# Altium PCB STM32F407VGT6.pcbdoc
Units mil, origin at the board's own origin, x right, y up, seen from the top; angles counter-clockwise.
Board outline 3885 x 2690 mil, 2 copper layers (Top Layer, Bottom Layer); 67 components, 120 nets, 346 pads, 112 vias.
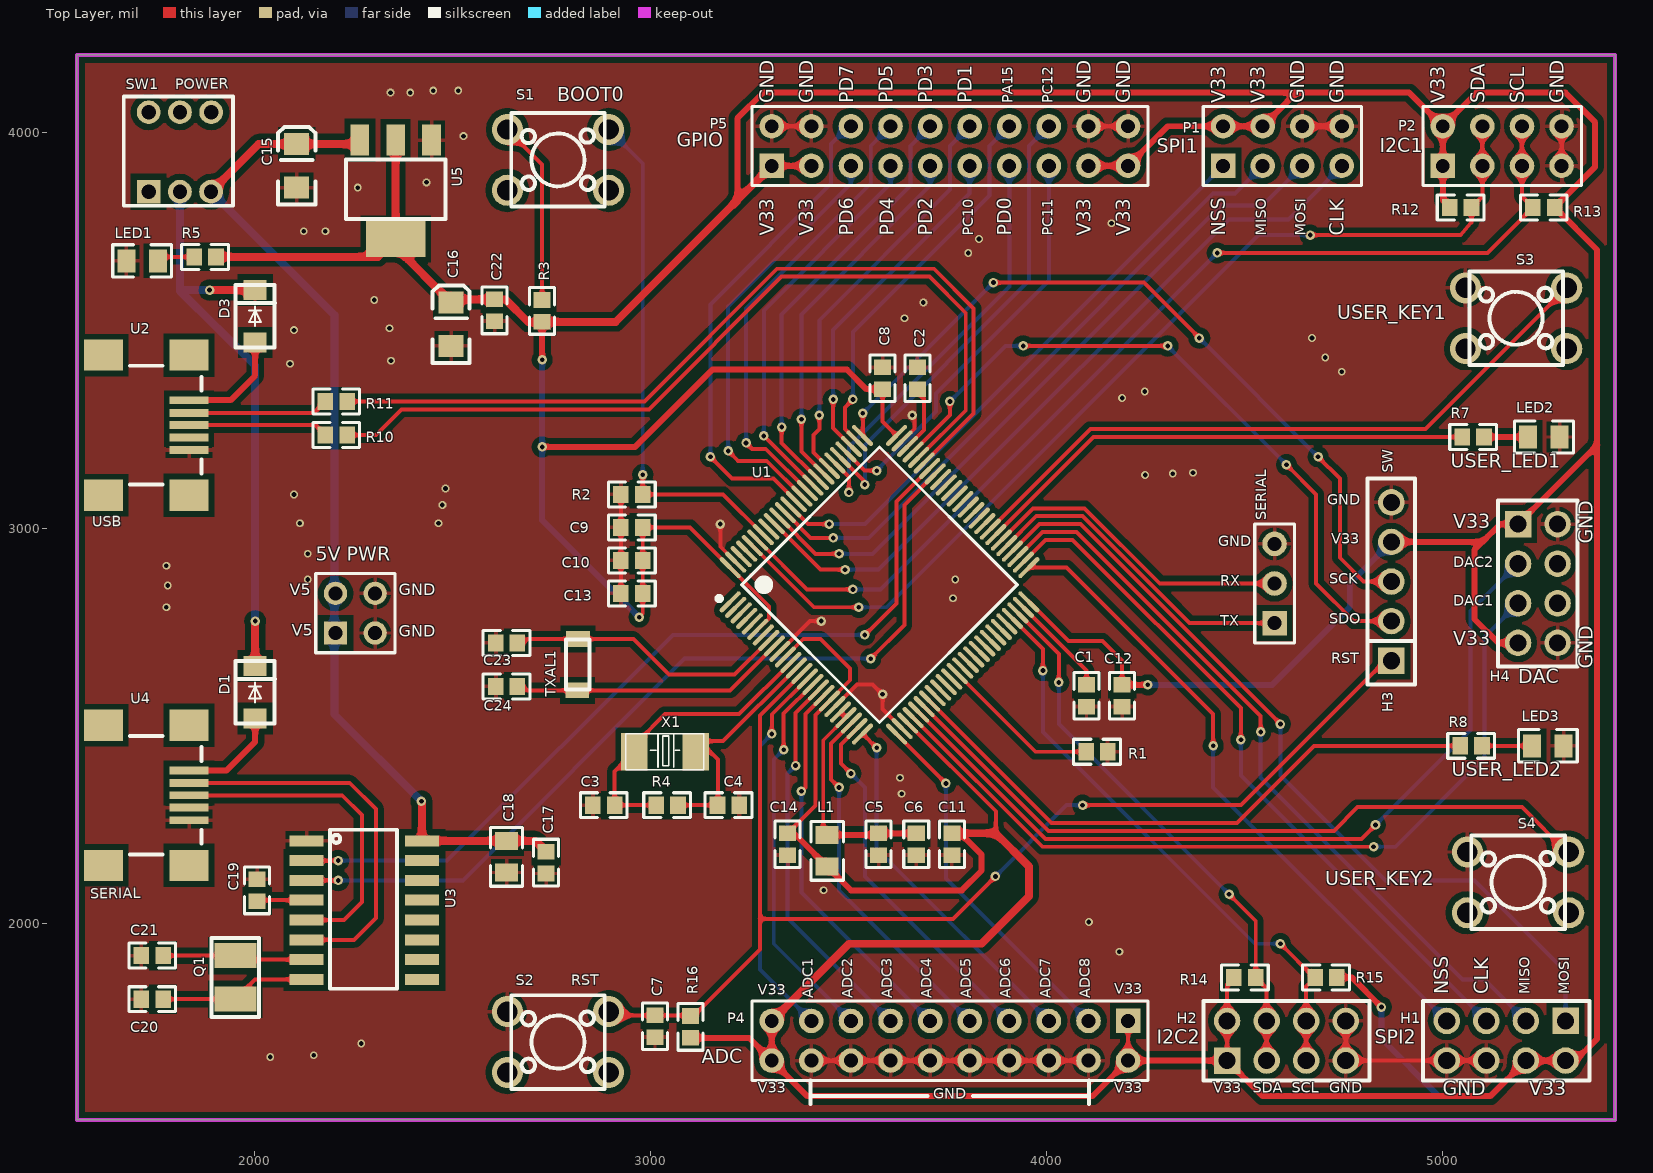
[diagram p0: Top Layer view]
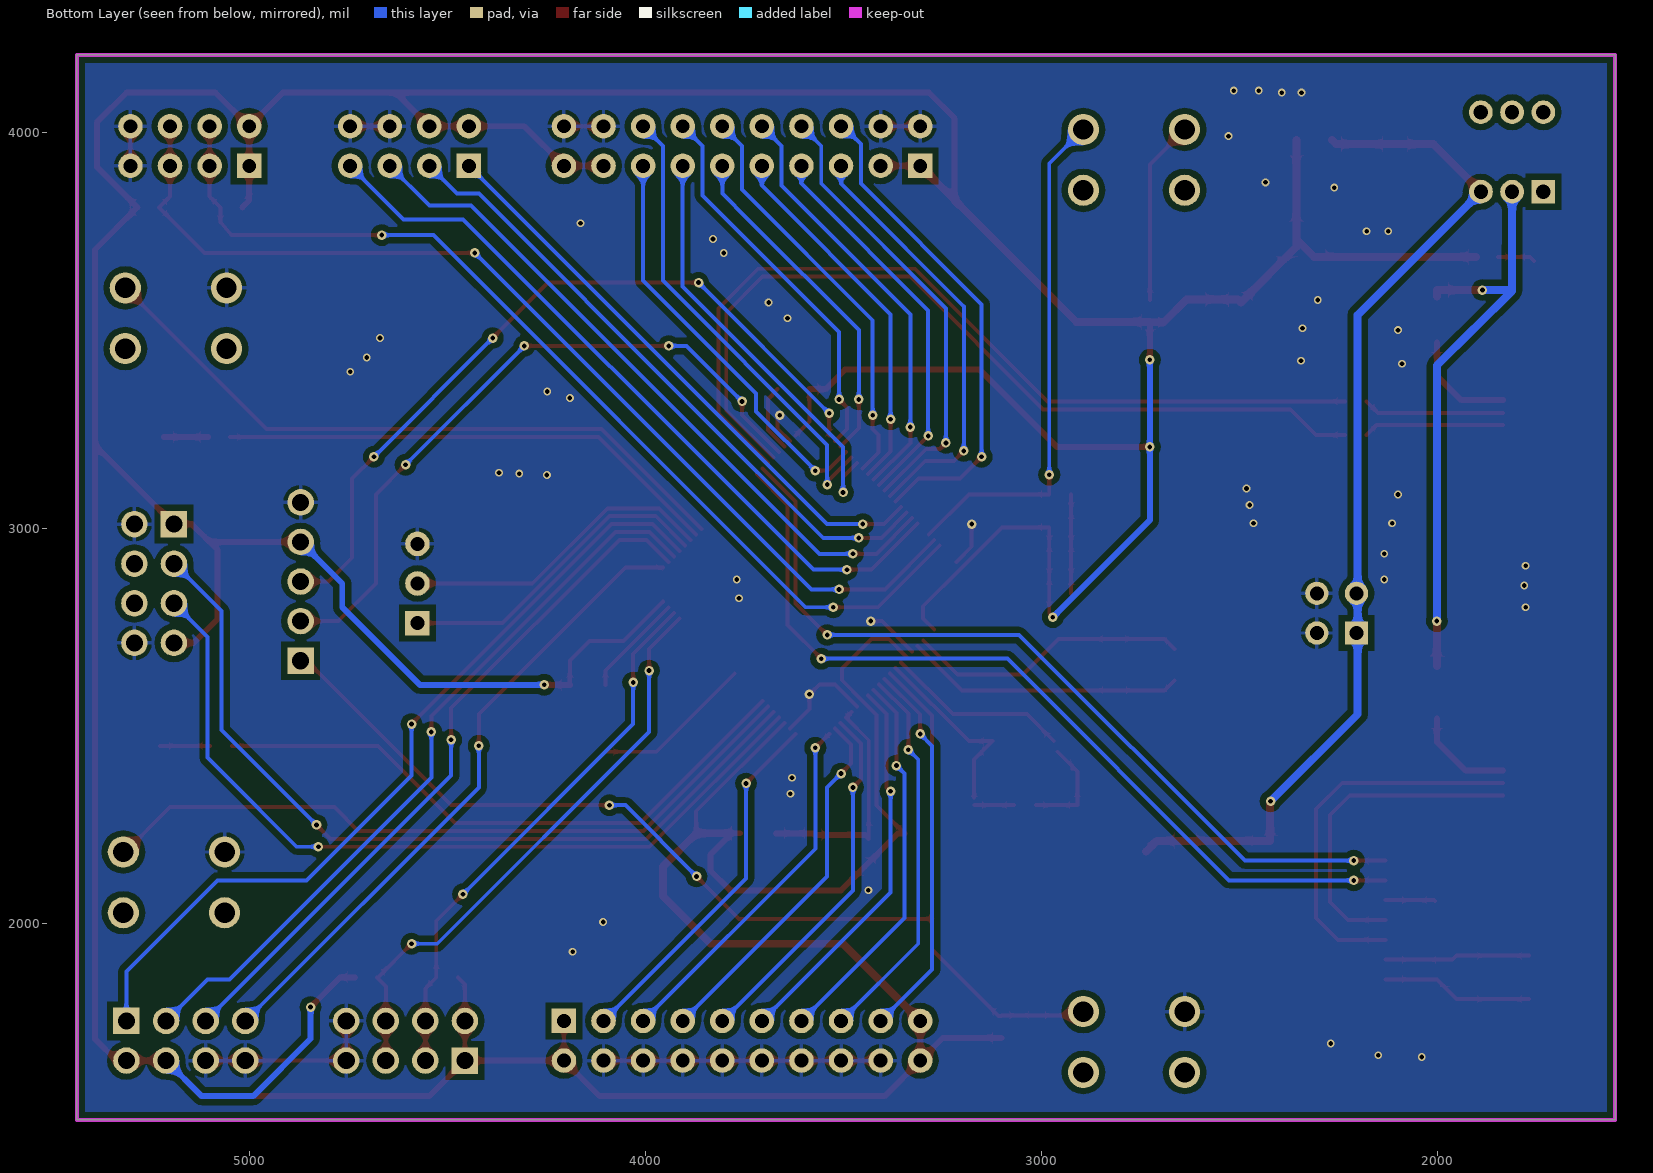
[diagram p1: Bottom Layer view, seen from below]

## Layer stack, top to bottom
Top Solder: solder mask 0.4, Solder Resist, Dk 3.5
Top Layer: signal copper 1.4
Dielectric1: dielectric 12.6, FR-4, Dk 4.8
Bottom Layer: signal copper 1.4
Bottom Solder: solder mask 0.4, Solder Resist, Dk 3.5

## Board outline
1552,1505 1552,4195 5437,4195 5437,1505

## Design rules (kind name [scope] priority, off if disabled: settings)
Clearance [All] p1: gap=5 ignorepadtopadclearanceinfootprint=FALSE except(15: Arc-Fill Arc-Poly Arc-Region Track-Fill Track-Poly Track-Region SMDPad-Fill SMDPad-Poly SMDPad-Region THPad-Fill THPad-Poly THPad-Region Via-Fill Via-Poly Via-Region Fill-Fill Fill-Poly Fill-Region Poly-Poly Poly-Region Region-Region)
PolygonConnect PolygonConnect_1 [All vs IsVia] p1: connectstyle=Direct reliefconductorwidth=10 reliefentries=4 polygonreliefangle="90 Angle" airgapwidth=10
PolygonConnect [All] p2: connectstyle=Relief reliefconductorwidth=10 reliefentries=4 polygonreliefangle="90 Angle" airgapwidth=10
RoutingVias [All] p1: holewidth=28 width=50 viastyle="Through Hole" minholewidth=28 minwidth=50 maxholewidth=28 maxwidth=50
SolderMaskExpansion [All] p1: expansion=4
Width [All] p1: maxlimit=30 minlimit=10 preferedwidth=10 minimp=50.000000 maximp=50.000000 favimp=50.000000
30 further rules are at their usual default settings.

## Components (designator, comment, footprint, x,y, rotation, side; value= is the part's Value field where it differs from the comment)
"5V PWR" "Comment" HDR2X2 2205,2735 r0 top
C1 "2.2uF" 0603#1 4102,2545 r90 top
C2 "2.2uF" 0603#1 3675,3410 r270 top
C3 "20pF" 0603#1 2914.05,2300 r180 top
C4 "20pF" 0603#1 3166.06,2300 r0 top
C5 "1uF" 0603#1 3577,2170 r90 top
C6 "104" 0603#1 3672,2170 r90 top
C7 "104" 0603#1 3012,1710 r90 top
C8 "10uF" 0603#1 3587,3410 r270 top
C9 "104" 0603#1 2922,3001.67 r0 top
C10 "104" 0603#1 2922,2918.33 r0 top
C11 "104" 0603#1 3762,2170 r90 top
C12 "104" 0603#1 4192,2545 r90 top
C13 "104" 0603#1 2922,2835 r0 top
C14 "104" 0603#1 3347,2170 r90 top
C15 "10UF-TANT" EIA3216 2107,3915 r90 top
C16 "10UF-TANT" EIA3216 2497,3515 r90 top
C17 "104" 0603#2 2737,2155 r90 top
C18 "10u" 0805#1 2637,2170 r90 top
C19 "104" 0603#2 2007,2085 r90 top
C20 "22p" 0603#2 1742,1810 r0 top
C21 "22p" 0603#2 1742,1920 r0 top
C22 "1u" 0603#2 2607,3550 r270 top
C23 "10p" 0603#2 2637,2710 r0 top
C24 "10p" 0603#2 2637,2600 r0 top
D1 "1N5824" SMA/DO-214AC 2002,2585 r90 top
D3 "1N5824" SMA/DO-214AC 2002,3535 r90 top
H1 "SPI2" DIP-2X4P-2.54 5162,1705 r180 top
H2 "I2C2" DIP-2X4P-2.54 4607,1705 r0 top
H3 "SW" DIP-1X5P-2.54MM-M 4872,2865 r90 top
H4 "Header-Female-2.54_2x4" DIP-2X4P-2.54 5242,2860 r270 top
L1 "100Ω" 0805#2 3447,2145 r90 top
LED1 "0805R (Blue)" 0805#2 1677,3675 r0 top
LED2 "0805R (Red)" 0805#2 5297,3230 r180 top
LED3 "0805R (Red)" 0805#2 5307,2450 r180 top
P1 "SPI1" HDR-4X2/2.54 4597,3965 r0 top
P2 "I2C1" HDR-4X2/2.54 5152,3965 r0 top
P4 "ADC" HDR-10X2/2.54 3757,1705 r180 top
P5 "GPIO" HDR-10X2/2.54 3757,3965 r0 top
Q1 "XTALfast" 3225 1952,1865 r90 top
R1 "10KΩ" 0603#1 4097,2435 r0 top
R2 "10KΩ" 0603#1 2922,3085 r0 top
R3 "1KΩ" 0603#1 2727,3580 r270 top
R4 "1MΩ" 0603#1 3074.05,2300 r180 top
R5 "1KΩ" 0603#1 1907,3685 r180 top
R7 "1KΩ" 0603#1 5047,3230 r0 top
R8 "1KΩ" 0603#1 5042,2450 r0 top
R10 "22" 0603#2 2207,3235 r180 top
R11 "22" 0603#2 2207,3320 r180 top
R12 "1k" 0603#2 5047,3810 r180 top
R13 "1k" 0603#2 5257,3810 r0 top
R14 "1k" 0603#2 4502,1865 r180 top
R15 "1k" 0603#2 4707,1865 r0 top
R16 "10k" 0603#2 3102,1740 r270 top
S1 "按键" KEY-TOUCH-DIP-6.0*6.0*H-(YX)_1 2767,3930 r0 top
S2 "按键" KEY-TOUCH-DIP-6.0*6.0*H-(YX)_1 2767,1701.77 r0 top
S3 "按键" KEY-TOUCH-DIP-6.0*6.0*H-(YX)_1 5187,3530 r0 top
S4 "按键" KEY-TOUCH-DIP-6.0*6.0*H-(YX)_1 5192,2105 r0 top
SERIAL "USART" HDR-3X1/2.54 4577,2860 r90 top (schematic designator P3)
SW1 "K8-7071D-L1" KEY-7X7 1812,3950 r0 top
TXAL1 "32.768K" SMD-3215_2P 2817,2655 r90 top
U1 "STM32F407VGT6" LQFP-100_14X14X05P 3202,2900 r45 top
U2 "MINI USB" USB-MINI-B 1727,3260 r0 top
U3 "CH340G" CH340G 2132,2210 r270 top
U4 "MINI USB" USB-MINI-B 1727,2325 r0 top
U5 "AMS1117-3.3" SOT-223 2357,3855 r270 top
X1 "8MHZ" SMD-5032_2P 2917.25,2518.03 r0 top

## Footprints (in the part's own frame and the unit in brackets; to place one, negate y for a bottom-side part, rotate by r counter-clockwise, add the part's x,y. Pads: shape width x height; smd on the part's side, far side on the other; paste and mask are expansions set on the pad)
0603#1 [mm]
  rect 1x1.1 smd: 1(0.1,0) 2(1.5,0)
  silkscreen extent -0.7,-0.8 2.3,0.8
0603#2 [mm]
  rect 1x1.1 smd: 1(-0.7,0) 2(0.7,0)
  silkscreen extent -1.5,-0.8 1.5,0.8
0805#1 [mm]
  rect 1.16x1.45 smd: 1(-1.016,0) 2(1.016,0)
  silkscreen extent -1.9,-1.03 1.87,1.04
0805#2 [mm]
  rect 1.16x1.47 smd: 1(0,0) 2(2.032,0)
  silkscreen extent -0.88,-1.04 2.89,1.04
3225 [mil]
  rect 63x106.3 smd: 1(-55,0) 2(55,0)
  silkscreen extent -100,-60 100,60
CH340G [mil]
  rect 27.6x86.6 smd: 1(0,0) 2(50,0) 3(100,0) 4(150,0) 5(200,0) 6(250,0) 7(300,0) 8(350,0) 9(350,291.3) 10(300,291.3) 11(250,291.3) 12(200,291.3) 13(150,291.3) 14(100,291.3) 15(50,291.3) 16(0,291.3)
  silkscreen extent -28,59 374,228
DIP-1X5P-2.54MM-M [mm]
  rect 1.7x1.7 hole 1.1: 1(-5.08,0)
  round 1.7 hole 1.1: 2(-2.54,0) 3(0,0) 4(2.54,0) 5(5.08,0)
  silkscreen extent -6.6,-1.52 6.6,1.52
DIP-2X4P-2.54 [mm]
  rect 1.7x1.7 hole 1.1: 1(-3.81,-1.27)
  round 1.7 hole 1.1: 2(-3.81,1.27) 3(-1.27,-1.27) 4(-1.27,1.27) 5(1.27,-1.27) 6(1.27,1.27) 7(3.81,-1.27) 8(3.81,1.27)
  silkscreen extent -5.33,-2.54 5.33,2.54
EIA3216 [mil]
  rect 55.1x63 smd: A(55,0) C(-55,0)
  silkscreen extent -98,-47 98,47
HDR2X2 [mm] "Connector; Header; 2x2 Position"
  rect 1.5x1.5 hole 0.9: 1(0,0)
  round 1.5 hole 0.9: 2(0,2.54) 3(2.54,0) 4(2.54,2.54)
  silkscreen extent -1.27,-1.27 3.81,3.81
HDR-3X1/2.54 [mil]
  rect 62x62 hole 35: 1(-100,0)
  round 62 hole 35: 2(0,0) 3(100,0)
  silkscreen extent -150,-50 150,50
HDR-4X2/2.54 [mil]
  rect 62x62 hole 35: 1(-150,-50)
  round 62 hole 35: 2(-150,50) 3(-50,-50) 4(-50,50) 5(50,-50) 6(50,50) 7(150,-50) 8(150,50)
  silkscreen extent -200,-100 200,100
HDR-10X2/2.54 [mil]
  rect 62x62 hole 35: 1(-450,-50)
  round 62 hole 35: 2(-450,50) 3(-350,-50) 4(-350,50) 5(-250,-50) 6(-250,50) 7(-150,-50) 8(-150,50) 9(-50,-50) 10(-50,50) 11(50,-50) 12(50,50) 13(150,-50) 14(150,50) 15(250,-50) 16(250,50) 17(350,-50) 18(350,50) 19(450,-50) 20(450,50)
  silkscreen extent -500,-100 500,100
KEY-7X7 [mil]
  rect 60x60 hole 36: 1(-78.9,-100.4)
  round 60 hole 36: 2(-0.1,-100.4) 3(78.6,-100.4) 4(-79,100.4) 5(0.1,100.4) 6(79,100.4)
  silkscreen extent -142,-136 134,140
KEY-TOUCH-DIP-6.0*6.0*H-(YX)_1 [mm]
  round 2 hole 1.3: 1(-3.25,1.95) 2(3.25,1.95) 3(-3.25,-1.95) 4(3.25,-1.95)
  silkscreen extent -3,-3 3,3
LQFP-100_14X14X05P [mm]
  oval 1.8x0.28 smd: 1(-1.55,-1.55) 2(-1.55,-2.05) 3(-1.55,-2.55) 4(-1.55,-3.05) 5(-1.55,-3.55) 6(-1.55,-4.05) 7(-1.55,-4.55) 8(-1.55,-5.05) 9(-1.55,-5.55) 10(-1.55,-6.05) 11(-1.55,-6.55) 12(-1.55,-7.05) 13(-1.55,-7.55) 14(-1.55,-8.05) 15(-1.55,-8.55) 16(-1.55,-9.05) 17(-1.55,-9.55) 18(-1.55,-10.05) 19(-1.55,-10.55) 20(-1.55,-11.05) 21(-1.55,-11.55) 22(-1.55,-12.05) 23(-1.55,-12.55) 24(-1.55,-13.05) 25(-1.55,-13.55) 51(13.55,-13.55) 52(13.55,-13.05) 53(13.55,-12.55) 54(13.55,-12.05) 55(13.55,-11.55) 56(13.55,-11.05) 57(13.55,-10.55) 58(13.55,-10.05) 59(13.55,-9.55) 60(13.55,-9.05) 61(13.55,-8.55) 62(13.55,-8.05) 63(13.55,-7.55) 64(13.55,-7.05) 65(13.55,-6.55) 66(13.55,-6.05) 67(13.55,-5.55) 68(13.55,-5.05) 69(13.55,-4.55) 70(13.55,-4.05) 71(13.55,-3.55) 72(13.55,-3.05) 73(13.55,-2.55) 74(13.55,-2.05) 75(13.55,-1.55)
  oval 0.28x1.8 smd: 26(0,-15.1) 27(0.5,-15.1) 28(1,-15.1) 29(1.5,-15.1) 30(2,-15.1) 31(2.5,-15.1) 32(3,-15.1) 33(3.5,-15.1) 34(4,-15.1) 35(4.5,-15.1) 36(5,-15.1) 37(5.5,-15.1) 38(6,-15.1) 39(6.5,-15.1) 40(7,-15.1) 41(7.5,-15.1) 42(8,-15.1) 43(8.5,-15.1) 44(9,-15.1) 45(9.5,-15.1) 46(10,-15.1) 47(10.5,-15.1) 48(11,-15.1) 49(11.5,-15.1) 50(12,-15.1) 76(12,0) 77(11.5,0) 78(11,0) 79(10.5,0) 80(10,0) 81(9.5,0) 82(9,0) 83(8.5,0) 84(8,0) 85(7.5,0) 86(7,0) 87(6.5,0) 88(6,0) 89(5.5,0) 90(5,0) 91(4.5,0) 92(4,0) 93(3.5,0) 94(3,0) 95(2.5,0) 96(2,0) 97(1.5,0) 98(1,0) 99(0.5,0) 100(0,0)
  silkscreen extent -2.05,-13.8 12.25,-0.75
SMA/DO-214AC [mil]
  rect 50x57.9 smd: 1(-66.3,0) 2(66.3,0)
  silkscreen extent -79,-50 79,50
SMD-3215_2P [mil]
  rect 39.37x60 smd: 1(-64.91,1.06) 2(64.84,-0.85)
  silkscreen extent -63,-30 63,30
SMD-5032_2P [mm]
  rect 1.7x2.4 smd: 1(1.086,-2.109) 2(5.007,-2.11)
  silkscreen extent 0.53,-3.25 5.53,-0.95
SOT-223 [mm]
  rect 2x1.2 smd: 1(-3.175,2.3) 2(-3.175,0) 3(-3.175,-2.3)
  rect 2.3x3.8 smd: 4(3.175,0)
  silkscreen extent -1.93,-3.2 1.87,3.2
USB-MINI-B [mil]
  rect 98.4x19.7 smd: 1(108,63) 2(108,31.02) 3(108,0) 4(108,-31.03) 5(108,-63)
  rect 98.4x78.7 smd: MTN1(-108,177) MTN2(108,177) MTN3(-108,-177) MTN4(108,-177)
  silkscreen extent -41,-150 140,150

## Via types
v1: diameter 24, hole 12, Top Layer to Bottom Layer, 65 vias
v2: diameter 19.68, hole 11.81, Top Layer to Bottom Layer, 47 vias

## Nets (pads, with @x,y where several pads share a name; then routed paths per layer and width w, separated by ;. In a path a pad name is that pad's centre, name@x,y a point inside that pad or via, vN(x,y) a via of type N, cw(c..) or ccw(c..) an arc to the next point about the centre after c; other vN are vias at no path point)
ADC1: P4.17 U1.15 | length 967.3
  Top Layer w10: v1(3307,2480) 3307,2529 U1.15
  Bottom Layer w10: v1(3307,2480) 3277,2450 3277,2375 3277,1885 P4.17
ADC2: P4.15 U1.16 | length 971.6
  Top Layer w10: v1(3337,2440) 3337,2531.1 U1.16
  Bottom Layer w10: v1(3337,2440) 3312,2415 3312,2330 3312,1950 P4.15
ADC3: P4.13 U1.17 | length 975.9
  Top Layer w10: v1(3367,2400) 3367,2533.28 U1.17
  Bottom Layer w10: v1(3367,2400) 3347,2380 3347,2325 3347,2015 P4.13
ADC4: P4.11 U1.18 | length 980.1
  Top Layer w10: v1(3382,2335) 3392,2345 3392,2530.4 U1.18
  Bottom Layer w10: v1(3382,2335) 3382,2080 P4.11
ADC5: P4.9 U1.23 | length 918.7
  Top Layer w10: v1(3477,2345) 3457,2365 3457,2456.2 U1.23
  Bottom Layer w10: v1(3477,2345) 3477,2085 P4.9
ADC6: P4.7 U1.24 | length 931.2
  Top Layer w10: v1(3507,2380) 3482,2405 3482,2453.4 U1.24@3522.2,2493.5
  Bottom Layer w10: v1(3507,2380) 3542,2345 3542,2175 3542,2120 P4.7
ADC7: P4.5 U1.25 | length 920.5
  Top Layer w10: U1.25 3537.36,2479.64 v1(3572,2445)
  Bottom Layer w10: v1(3572,2445) 3572,2190 P4.5
ADC8: P4.3 U1.26 | length 925.3
  Top Layer w10: U1.26 v1(3747,2355)
  Bottom Layer w10: v1(3747,2355) 3747,2115 P4.3
D+: U3.5 U4.3 | length 836.4
  Top Layer w10: U4.3 2222,2325 2272,2275 2272,2055 2227,2010 U3.5
D-: U3.6 U4.2 | length 972.1
  Top Layer w10: U4.2 2240.98,2356.02 2307,2290 2307,2025 2307,2015 2257,1965 2252,1960 U3.6
DAC1: H4.5 U1.29 | length 2096.5
  Top Layer w10: U1.29 3990.51,2195 v1(4827,2195)
  Bottom Layer w10: v1(4827,2195) 4882,2195 5067,2380 5107,2420 5107,2690 5107,2725 H4.5
DAC2: H4.3 U1.30 | length 2110.3
  Top Layer w10: U1.30 3998.3,2215 4797,2215 v1(4832,2250)
  Bottom Layer w10: v1(4832,2250) 5072,2490 5072,2775 5072,2790 H4.3
GND: "5V PWR.3" "5V PWR.4" C1.1 C2.1 C3.2 C4.2 C5.1 C6.1 C7.1 C8.1 C9.1 C10.1 C11.1 C12.1 C13.1 C14.1 C15.C C16.C C17.1 C18.1 C19.2 C20.1 C21.1 C22.2 C23.1 C24.1 H1.6 H1.8 H2.7 H2.8 H3.5 H4.2 H4.8 LED1.1 LED2.1 LED3.1 P1.6 P1.8 P2.7 P2.8 P4.4 P4.6 P4.8 P4.10 P4.12 P4.14 P4.16 P4.18 P5.2 P5.4 P5.18 P5.20 R1.2 R2.1 S2.1 S3.1 S4.1 SERIAL.3 U1.10 U1.20 U1.27 U1.74 U1.99 U2.5 U3.1 U4.4 U4.5 U5.1 | length 2394.1
  Top Layer w10: C13.1 C10.1 C9.1 R2.1 ; v1(3177,3010) 3177,2952.83 U1.99 ; P5.2 P5.4 ; U1.10 3403.85,2765 v1(3432,2765) ; P4.18 P4.4 ; U1.20 3522.25,2605 3557,2605 3562,2605 v1(3587,2580) 3587,2542.83 U1.27 ; U1.74@3636.3,3220.1 3667,3250.9 3667,3280 v1(3662,3285) ; P5.18 P5.20 ; H2.8 H2.7 H1.6 ; P2.7 P2.8
  Top Layer w15: P1.6 P1.8
  other v2: 2040,1663.76 2150,1668.23 2270,1698.21 4185,1930 4108.01,2005 3438,2085 3635,2328.69 3630.93,2369.58 1777.8,2799.79 3764.82,2822.52 1781.33,2855 2135,2870 3770.38,2870 1777.8,2905 2135,2935 2115,3012.08 2465,3012.08 2475,3058.35 2100,3085 2482.78,3100 4250,3133.85 4320,3137.53 4370.99,3140 4192,3328.68 4249.26,3345 4747,3395 2090,3415 2345,3422.45 4705,3430.85 4671.8,3480 2100,3500 2341.49,3505 3642.09,3530 3690,3570 2302.78,3576.06 3803.32,3695 3830.26,3730 2125,3750 2179.45,3750 4165,3770 2261.16,3860 2435,3873.23 2528.11,3990 2343.76,4100 2393.84,4100 2452.01,4105 2515,4105
H4_4: H4.4
H4_6: H4.6
I2C1_SCL: P2.5 P2.6 R13.1 U1.95 | length 2625.5
  Top Layer w10: U1.95 3396.19,2845 v1(3512,2845) ; v1(4432,3695) 5114.4,3695 R13.1 ; P2.6 P2.5 5202,3837.44 R13.1
  Bottom Layer w10: v1(3512,2845) 3582,2845 v1(4432,3695)
I2C1_SDA: P2.3 P2.4 R12.1 U1.96 | length 2539.7
  Top Layer w10: U1.96 3413.35,2800 v1(3527,2800) ; v1(4667,3740) 5047,3740 5072,3770 5074.56,3772.44 R12.1 5102,3837.44 P2.3 P2.4
  Bottom Layer w10: v1(3527,2800) 3597,2800 4537,3740 v1(4667,3740)
I2C2_SCL: H2.5 H2.6 R15.1 U1.47 | length 1482.5
  Top Layer w10: U1.47 3992,2694.63 v1(3992,2640) ; v1(4592,1950) 4677,1865 R15.1 4657,1842.56 H2.6 H2.5
  Bottom Layer w10: v1(3992,2640) 3992,2485 4527,1950 v1(4592,1950)
I2C2_SDA: H2.3 H2.4 R14.1 U1.48 | length 1391.2
  Top Layer w10: U1.48 4032,2682.45 v1(4032,2610) ; v1(4462,2075) 4529.56,2007.44 R14.1 4557,1837.56 H2.4 H2.3
  Bottom Layer w10: v1(4032,2610) 4032,2505 v1(4462,2075)
KEY1: S3.2 U1.58 | length 1708.3
  Top Layer w10: U1.58 4111.57,3250 4958.18,3250 S3.2
KEY2: S4.2 U1.31 | length 1831.8
  Top Layer w10: U1.31 4006.2,2235 4727,2235 4787,2295 5202,2295 5317.6,2179.4 S4.2@5319.9,2181.8
LED1: R7.1 U1.57 | length 1280.1
  Top Layer w10: U1.57 4119.4,3230 R7.1
LED2: R8.1 U1.32 | length 1548.5
  Top Layer w10: U1.32 4014.03,2255 4482,2255 4677,2450 R8.1
LED2_2: LED2.2 R7.2 | length 110.9
  Top Layer w15: R7.2 LED2.2
LED3_2: LED3.2 R8.2 | length 125.9
  Top Layer w10: R8.2 LED3.2
NRST: C7.2 H3.1 R16.1 S2.2 U1.14 | length 3062.7
  Top Layer w10: S2.2 2904.44,1769.05 C7.2 3100.51,1769.05 R16.1 3109.56,1767.56 3277,1935 3277,1950 3277,1975 3277,2040 3277,2185 3277,2526.79 U1.14 ; 3277,2012.82 3764.82,2012.82 v1(3872,2120) ; v1(4092,2300) 4492,2300 4857,2665 H3.1
  Bottom Layer w10: v1(3872,2120) 4052,2300 v1(4092,2300)
PA8: U1.67
PA15: P5.14 U1.77 | length 979.3
  Top Layer w10: v1(3512,3325) 3492,3305 3492,3250.3 U1.77@3522.2,3220.1
  Bottom Layer w10: v1(3512,3325) 3512,3495 3857,3840 3857,3965 P5.14
PB0: U1.35
PB1: U1.36
PC4: U1.33
PC5: U1.34
PC8: U1.65
PC9: U1.66
PC10: P5.11 U1.78 | length 870.8
  Top Layer w10: v1(3462,3325) 3462,3252.5 U1.78
  Bottom Layer w10: v1(3462,3325) 3462,3500 3742,3780 3807,3845 P5.11
PC11: P5.15 U1.79 | length 1047.5
  Top Layer w10: U1.79 3541.63,3145 v1(3572,3145)
  Bottom Layer w10: v1(3572,3145) 3722,3295 3722,3340 4007,3625 4007,3845 P5.15
PC12: P5.16 U1.80 | length 1191.5
  Top Layer w10: U1.80 3542,3116.77 v1(3542,3110)
  Bottom Layer w10: v1(3542,3110) 3542,3210 3957,3625 3957,3965 P5.16
PD0: P5.13 U1.81 | length 1081.9
  Top Layer w10: U1.81 3502,3128.95 v1(3502,3090)
  Bottom Layer w10: v1(3502,3090) 3502,3205 3907,3610 3907,3850 P5.13
PD1: P5.12 U1.82 | length 1051.1
  Top Layer w10: v1(3427,3285) 3427,3250 3412,3235 3412,3191.1 U1.82@3452.55,3150.55
  Bottom Layer w10: v1(3427,3285) 3427,3525 3757,3855 3757,3965 ; 3757,3958.79 3757,3965 ; P5.12 3757,3965
PD2: P5.9 U1.83 | length 936.5
  Top Layer w10: v1(3382,3275) 3382,3193.27 U1.83
  Bottom Layer w10: v1(3382,3275) 3382,3540 3692,3850 3707,3865 P5.9
PD3: P5.10 U1.84 | length 1086
  Top Layer w10: v1(3332,3255) 3332,3215.42 U1.84
  Bottom Layer w10: v1(3332,3255) 3332,3540 3657,3865 3657,3965 P5.10
PD4: P5.7 U1.85 | length 992.4
  Top Layer w10: v1@3287,3235 v1(3287,3232.59) U1.85
  Bottom Layer w10: v1(3287,3232.59) 3287,3550 3587,3850 3607,3870 P5.7
PD5: P5.8 U1.86 | length 1155.8
  Top Layer w10: v1(3242,3215) 3257,3200 3291.8,3200 U1.86
  Bottom Layer w10: v1(3242,3215) 3242,3555 3557,3870 3557,3965 P5.8
PD6: P5.5 U1.87 | length 1081.6
  Top Layer w10: v1(3197,3195) 3222,3170 3293.91,3170 U1.87
  Bottom Layer w10: v1(3197,3195) 3197,3560 3487,3850 3507,3870 P5.5
PD7: P5.6 U1.88 | length 1248.8
  Top Layer w10: v1(3152,3180) 3207,3125 3311.07,3125 U1.88
  Bottom Layer w10: v1(3152,3180) 3152,3565 3457,3870 3457,3970 3502,4015 P5.6
PE7: U1.38
PE8: U1.39
PE9: U1.40
PE10: U1.41
PE11: U1.42
PE12: U1.43
PE13: U1.44
PE14: U1.45
PE15: U1.46
R3_1: R3.1 S1.1 | length 467.1
  Top Layer w10: S1.1 2727,3918.82 R3.1
R5_2: LED1.2 R5.2 | length 95.1
  Top Layer w10: LED1.2 1767.02,3685 R5.2
S$15: 
S$17: 
S$21: 
S$23: 
S$67: 
S$69: 
SPI1_CLK: P1.7 U1.92 | length 1904.3
  Top Layer w10: U1.92 3429.71,2895 v1(3492,2895)
  Bottom Layer w10: v1(3492,2895) 3577,2895 3717,3035 4462,3780 4557,3780 4612,3780 P1.7
SPI1_MISO: P1.3 U1.90 | length 1621.7
  Top Layer w10: U1.90 3405.39,2975 v1(3462,2975)
  Bottom Layer w10: v1(3462,2975) 3552,2975 3882,3305 4422,3845 4467,3845 4477,3845 P1.3
SPI1_MOSI: P1.5 U1.91 | length 1763
  Top Layer w10: U1.91 3417.55,2935 v1(3477,2935)
  Bottom Layer w10: v1(3477,2935) 3562,2935 3967,3340 4442,3815 4542,3815 4547,3815 P1.5
SPI1_NSS: P1.1 U1.89 | length 1484.6
  Top Layer w10: U1.89 3398.23,3010 v1(3452,3010)
  Bottom Layer w10: v1(3452,3010) 3542,3010 P1.1
SPI2_CLK: H1.5 U1.52 | length 1795.6
  Top Layer w10: U1.52 3998.6,2970 4067,2970 4492,2545 v1(4492,2465)
  Bottom Layer w10: v1(4492,2465) 4492,2375 H1.5
SPI2_MISO: H1.3 U1.53 | length 1911.5
  Top Layer w10: U1.53 3990.8,2990 4077,2990 4542,2525 v1(4542,2485)
  Bottom Layer w10: v1(4542,2485) 4542,2370 5052,1860 5107,1860 H1.3
SPI2_MOSI: H1.1 U1.54 | length 2094.8
  Top Layer w10: U1.54 3982.9,3010 4087,3010 v1(4592,2505)
  Bottom Layer w10: v1(4592,2505) 4592,2375 4857,2110 5082,2110 5312,1880 H1.1
SPI2_NSS: H1.7 U1.51 | length 1638.2
  Top Layer w10: U1.51 4052,2900 4422,2530 v1(4422,2450)
  Bottom Layer w10: v1(4422,2450) 4422,2345 H1.7
SW1_1: SW1.1
SW1_4: SW1.4
SW1_5: SW1.5
SW1_6: SW1.6
SWCLK: H3.3 U1.76 | length 1957.9
  Top Layer w10: U1.76 3537,3234.99 v1(3537,3290) ; v1(3867,3620) 4247,3620 v1(4387,3480) ; v1(4687,3180) 4742,3125 4742,2925 4802,2865 H3.3
  Bottom Layer w10: v1(3537,3290) v1(3867,3620) ; v1(4387,3480) v1(4687,3180)
SWDIO: H3.2 U1.72 | length 1758.8
  Top Layer w10: U1.72 3757,3285.19 v1(3757,3320) ; v1(3942,3460) v1(4307,3460) ; v1(4607,3160) 4682,3085 4682,2860 4777,2765 H3.2
  Bottom Layer w10: v1(3757,3320) 3897,3460 v1(3942,3460) ; v1(4307,3460) v1(4607,3160)
U1_1: U1.1
U1_2: U1.2
U1_3: U1.3
U1_4: U1.4
U1_5: U1.5
U1_7: U1.7
U1_8: C23.2 TXAL1.2 U1.8 | length 718.2
  Top Layer w10: C23.2@2664.56,2695 2689.4,2719.84 TXAL1.2 ; TXAL1.2 2957.2,2719.8 3047,2630 3213.2,2630 U1.8
U1_9: C24.2 TXAL1.1 U1.9 | length 705.6
  Top Layer w10: C24.2@2664.56,2615 2689.47,2590.09 TXAL1.1 3201.1,2590.09 U1.9
U1_12: C3.1 R4.2 U1.12 X1.1 | length 728.2
  Top Layer w10: X1.1 2910.11,2385.11 C3.1 R4.2 ; X1.1@2969.75,2461.97 3037.78,2530 3224.54,2530 U1.12
U1_13: C4.1 R4.1 U1.13 X1.2 | length 582.7
  Top Layer w10: R4.1 C4.1 ; C4.1@3170.94,2320 3170.94,2415.1 3124.11,2461.93 3184.3,2461.93 U1.13
U1_37: R1.1 U1.37 | length 407.4
  Top Layer w10: U1.37 3973.23,2435 R1.1
U1_49: C1.2 U1.49 | length 261.8
  Top Layer w10: U1.49 4102,2640.3 C1.2@4102,2604.06
U1_63: U1.63
U1_64: U1.64
U1_73: C2.2 U1.73 | length 172.4
  Top Layer w10: U1.73 3692,3248.02 3692,3300 3692,3325.95 C2.2@3667,3350.95
U1_93: U1.93
U1_94: R2.2 S1.2 U1.94 | length 1303.9
  Top Layer w10: v1(2981.06,3135) R2.2 3184.03,3085 U1.94
  Bottom Layer w10: S1.2 2981.06,3920.66 v1(2981.06,3135)
U1_97: U1.97
U1_98: U1.98
U2_2: R11.2 U2.2 | length 356.5
  Top Layer w10: U2.2 2150.47,3291.02 R11.2
U2_3: R10.2 U2.3 | length 354.8
  Top Layer w10: U2.3 2154.45,3260 R10.2
U2_4: U2.4
U3_4: C19.1 U3.4 | length 126.1
  Top Layer w10: C19.1 2009.56,2060 U3.4
U3_7: C21.2 Q1.2 U3.7 | length 366.6
  Top Layer w10: C21.2 Q1.2 1962,1910 U3.7
U3_8: C20.2 Q1.1 U3.8 | length 383.2
  Top Layer w10: C20.2 Q1.1 2002,1860 U3.8
U3_9: U3.9
U3_10: U3.10
U3_11: U3.11
U3_12: U3.12
U3_13: U3.13
U3_14: U3.14
U3_15: U3.15
USART1_RX: U1.69 U3.2 | length 2134.5
  Top Layer w10: U3.2 v1(2212,2160) ; v1(3542,2730) 3622,2810 3622,3066.67 U1.69@3705.88,3150.55
  Bottom Layer w10: v1(2212,2160) 2487,2160 3057,2730 v1(3542,2730)
USART1_TX: U1.68 U3.3 | length 2191
  Top Layer w10: U3.3 v1(2212,2110) ; v1(3557,2670) 3642,2755 3642,3058.83 U1.68
  Bottom Layer w10: v1(2212,2110) 2527,2110 3087,2670 v1(3557,2670)
USART3_RX: SERIAL.2 U1.56 | length 802.2
  Top Layer w10: U1.56 3967.2,3050 4097,3050 4287,2860 SERIAL.2
USART3_TX: SERIAL.1 U1.55 | length 818.8
  Top Layer w10: U1.55 3975.1,3030 4092,3030 4362,2760 SERIAL.1
USB-D: R11.1 U1.70 | length 2204.9
  Top Layer w10: R11.1 2985,3320 3320,3655 3717,3655 3817,3555 3817,3289.5 U1.70
USB-P: R10.1 U1.71 | length 2180.1
  Top Layer w10: R10.1 2307,3235 2372,3300 2997,3300 3332,3635 3705,3635 3797,3543 3797,3297.34 U1.71
VCC5: D1.2 D3.2 SW1.2 | length 1483.3
  Top Layer w20: v1(1887,3601.3) D3.2 D3.2@2002,3585 ; D1.2 v1(2002,2765)
  Bottom Layer w20: SW1.2 1812.3,3599.1 2002,3410.8 v1(2002,2765) ; 1812.3,3601.3 v1(1887,3601.3)
VCC5_1: D1.1 U4.1 | length 255.5
  Top Layer w15: U4.1 1930,2388 2002,2460 D1.1
VCC5_2: D3.1 U2.1 | length 276.4
  Top Layer w15: U2.1 1940,3323 2002,3385 D3.1
VCC5_IN: "5V PWR.1" "5V PWR.2" C15.A C17.2 C18.2 SW1.3 U3.16 U5.3 | length 2615.2
  Top Layer w20: SW1.3 2011,3970 C15.A 2256.45,3970 U5.3 ; v1(2422,2310) 2423.3,2308.7 U3.16 C18.2 2709.55,2210 C17.2
  Bottom Layer w20: SW1.3 2202,3538.2 2202,2530 v1(2422,2310)
VCC-3.3V: C8.2 C9.2 C10.2 C11.2 C12.2 C13.2 C14.2 C16.A C22.1 H1.2 H1.4 H2.1 H2.2 H3.4 H4.1 H4.7 L1.1 P1.2 P1.4 P2.1 P2.2 P4.1 P4.2 P4.19 P4.20 P5.1 P5.3 P5.17 P5.19 R3.2 R5.1 R12.2 R13.2 R14.2 R15.2 R16.2 U1.6 U1.11 U1.19 U1.28 U1.50 U1.75 U1.100 U5.2 U5.4 | length 19010.4
  Top Layer w10: v1(2972,2775) 2981.06,2784.06 C13.2 C10.2 C9.2 3100.33,3001.67 U1.100 3299.44,2802.56 3299.44,2771.95 U1.6 ; U1.11 3386.49,2719.8 3430.2,2719.8 3505,2645 3505,2615.6 3452.55,2563.15 3417,2527.6 3417,2299.05 C14.2 ; C8.2 3587,3269.43 U1.75 ; U1.28 3872.95,2284.73 3872.95,2229.05 ; U1.50 U1.50@3957.61,2813.7 ; U1.50@3957.02,2814.29 U1.50@3957.61,2813.7 ; C12.2 4192,2665 4142,2715 4056.31,2715 U1.50@3957.61,2813.7 ; P4.2 P4.1 ; H2.1 H2.2 4457,1847.55 R14.2
  Top Layer w15: v1(2727,3205) 2962,3205 3157,3400 3497,3400 3546.05,3350.95 C8.2@3587,3350.95 ; v1(2727,3425) R3.2 ; R16.2 3249.56,1712.44 P4.20 ; 3220,3828 3220,4035 3285,4100 4632,4100 ; P4.19 P4.20 ; P5.1 P5.3 ; C14.2 3362.96,2229.05 L1.1 3507,2085 3787,2085 3837,2135 3837,2175 3783.05,2229.05 3783,2229.1 C11.2@3762,2229.1 ; P5.17 P5.19 4307,4015 P1.2 P1.4 4632,4100 ; C12.2 v1(4257,2604.05) ; R15.2 4772,1865 v1(4847,1790) ; H3.4 5102,2965 ; R12.2 5002,3827.45 P2.1 P2.2 ; H4.7 5142,2710 5082,2770 5082,2945 5102,2965 ; P4.20 3397,1565 4117,1565 P4.2 H2.1 4547,1565 5122,1565 H1.4 H1.2 5337,1655 5392,1710 5392,3210 ; 4632,4100 4917,4100 P2.2 ; P2.2 5087,4100 5312,4100 5387,4025 5387,3912.44 R13.2 5392,3702.56 5392,3210 ; 5102,2965 5147,3010 H4.1 5392,3210
  Top Layer w20: R5.1 2312,3685 U5.4 ; U5.2 U5.4 ; C16.A 2357,3710 U5.4 ; C22.1 2634.44,3577.56 2692,3520 2726.06,3520 R3.2 2912.94,3520.94 3220,3828 P5.1 ; P4.19 3502,1950 3837,1950 3957,2070 3957,2145 3872.95,2229.05 C11.2@3783.05,2229.05
  Top Layer w20.04: C16.A 2504.56,3577.56 C22.1
  Bottom Layer w15: v1(2727,3425) v1(2727,3205) 2727,3020 v1(2972,2775) ; v1(4257,2604.05) 4571.05,2604.05 4767,2800 4767,2860 H3.4 ; v1(4847,1790) 4847,1710 4992,1565 5122,1565 H1.4
VDDA: C5.2 C6.2 L1.2 U1.21 U1.22 | length 590.6
  Top Layer w10: L1.2 3437,2215 3437,2464.1 U1.22 U1.21
  Top Layer w15: L1.2 3572.95,2225 C5.2 C6.2
pads on no net: S1.3 S1.4 S2.3 S2.4 S3.3 S3.4 S4.3 S4.4 U1.59 U1.60 U1.61 U1.62 U2.MTN1 U2.MTN2 U2.MTN3 U2.MTN4 U4.MTN1 U4.MTN2 U4.MTN3 U4.MTN4

## Polygon pours and split planes (outlines as drawn)
GND on Top Layer (solid, remove dead copper, pour order 0): 1552,4195 5437,4195 5437,1505 1552,1505
GND on Bottom Layer (solid, remove dead copper, pour order 2): 1552,4195 5437,4195 5437,1505 1552,1505

## Silkscreen, mask and mechanical layers (free items; w line width, h text height)
Top Overlay:
  lines w10: 3405,1545 3405,1605 ; 3405,1565 3700,1565 ; 3815,1565 4108.01,1565 ; 4108.01,1545 4108.01,1605
  text "POWER" at 1800,4100 h45 r0.61
  text "GND" at 3325,4072.94 h60 r90
  text "GND" at 3425,4072.94 h60 r90
  text "PD7" at 3525,4072.94 h60 r90
  text "PD5" at 3625,4072.94 h60 r90
  text "PD3" at 3724.5,4072.94 h60 r90
  text "PD1" at 3825,4072.94 h60 r90
  text "PA15" at 3925,4072.94 h45 r90
  text "PC12" at 4025,4072.94 h45 r90
  text "GND" at 4125,4072.94 h60 r90
  text "GND" at 4225,4072.94 h60 r90
  text "V33" at 4465,4072.94 h60 r90
  text "V33" at 4565,4072.94 h60 r90
  text "GND" at 4665,4072.94 h60 r90
  text "GND" at 4765,4072.94 h60 r90
  text "V33" at 5020,4073 h60 r90
  text "SDA" at 5120,4072.94 h60 r90
  text "SCL" at 5220,4072.94 h60 r90
  text "GND" at 5319.95,4072.94 h60 r90
  text "BOOT0" at 2765,4065 h60
  text "GPIO" at 3067,3950 h60
  text "I2C1" at 4842.94,3937 h60
  text "SPI1" at 4280,3935 h60
  text "V33" at 3325,3737.94 h60 r90
  text "V33" at 3425,3737.94 h60 r90
  text "PD6" at 3525,3737.94 h60 r90
  text "PD4" at 3628,3737.94 h60 r90
  text "PD2" at 3725,3737.94 h60 r90
  text "PC10" at 3825,3737.94 h45 r90
  text "PD0" at 3925,3737.94 h60 r90
  text "PC11" at 4025,3737.94 h45 r90
  text "V33" at 4125,3737.94 h60 r90
  text "V33" at 4225,3737.94 h60 r90
  text "NSS" at 4465,3737.94 h60 r90
  text "MISO" at 4565,3737.94 h45 r90
  text "MOSI" at 4665,3737.94 h45 r90
  text "CLK" at 4765,3737.94 h60 r90
  text "USER_KEY1" at 4735,3515 h60
  text "SW" at 4885,3140 h45 r90
  text "USER_LED1" at 5022,3140 h60
  text "GND" at 4710,3050 h45
  text "USB" at 1590,2995 h45 r0.61
  text "V33" at 5027.94,2987 h60
  text "GND" at 5393,2960.02 h60 r90
  text "V33" at 4720,2952 h45
  text "GND" at 4435,2945 h45
  text "DAC2" at 5027.94,2892 h45
  text "SCK" at 4715,2850 h45
  text "RX" at 4440,2845 h45
  text "DAC1" at 5027.94,2795 h45
  text "SDO" at 4715,2750 h45
  text "TX" at 4440,2745 h45
  text "V33" at 5027.94,2692 h60
  text "RST" at 4720,2650 h45
  text "GND" at 5392.9,2645 h60 r90
  text "DAC" at 5192,2595 h60
  text "USER_LED2" at 5025,2360 h60
  text "USER_KEY2" at 4705,2085 h60
  text "SERIAL" at 1585,2055 h45 r0.61
  text "RST" at 2800,1836.38 h45 r0.61
  text "NSS" at 5028,1822.94 h60 r90
  text "CLK" at 5130,1822.94 h60 r90
  text "MISO" at 5230,1822.94 h45 r90
  text "MOSI" at 5330,1822.94 h45 r90
  text "V33" at 4172,1815 h45
  text "V33" at 3272,1812.81 h45
  text "ADC1" at 3420,1812.81 h45 r90.61
  text "ADC2" at 3520,1812.81 h45 r90.61
  text "ADC3" at 3620,1812.81 h45 r90.61
  text "ADC4" at 3720,1812.81 h45 r90.61
  text "ADC5" at 3820,1812.81 h45 r90.61
  text "ADC6" at 3920,1812.81 h45 r90.61
  text "ADC7" at 4020,1812.81 h45 r90.61
  text "ADC8" at 4120,1812.81 h45 r90.61
  text "I2C2" at 4280,1685 h60
  text "SPI2" at 4830,1685 h60
  text "ADC" at 3130,1635 h60
  text "V33" at 3272,1565 h45
  text "V33" at 4172,1565 h45
  text "V33" at 4422,1565 h45
  text "SDA" at 4522,1565 h45
  text "SCL" at 4620,1565 h45
  text "GND" at 4715,1565 h45
  text "GND" at 5002,1555 h60
  text "V33" at 5220,1555 h60
  text "GND" at 3715,1550 h45

## Text inside footprints (layer, text, board x,y; h text height)
"5V PWR": Top Overlay "V5" at 2094.45,2717.99 h50; Top Overlay "V5" at 2090,2820 h50; Top Overlay "GND" at 2365,2820 h50; Top Overlay "GND" at 2365,2715 h50